# Altium PCB ESE516_BareBoardTemplate.PcbDoc (part 2 of 2)
Units mil, origin at the board's own origin, x right, y up, seen from the top; angles counter-clockwise.
Board outline 2362.21 x 2362.21 mil, 4 copper layers (Top Layer, GroundPlane, PowerPlane, Bottom Layer), stack 58.4 mil thick; 99 components, 72 nets, 333 pads, 111 vias.
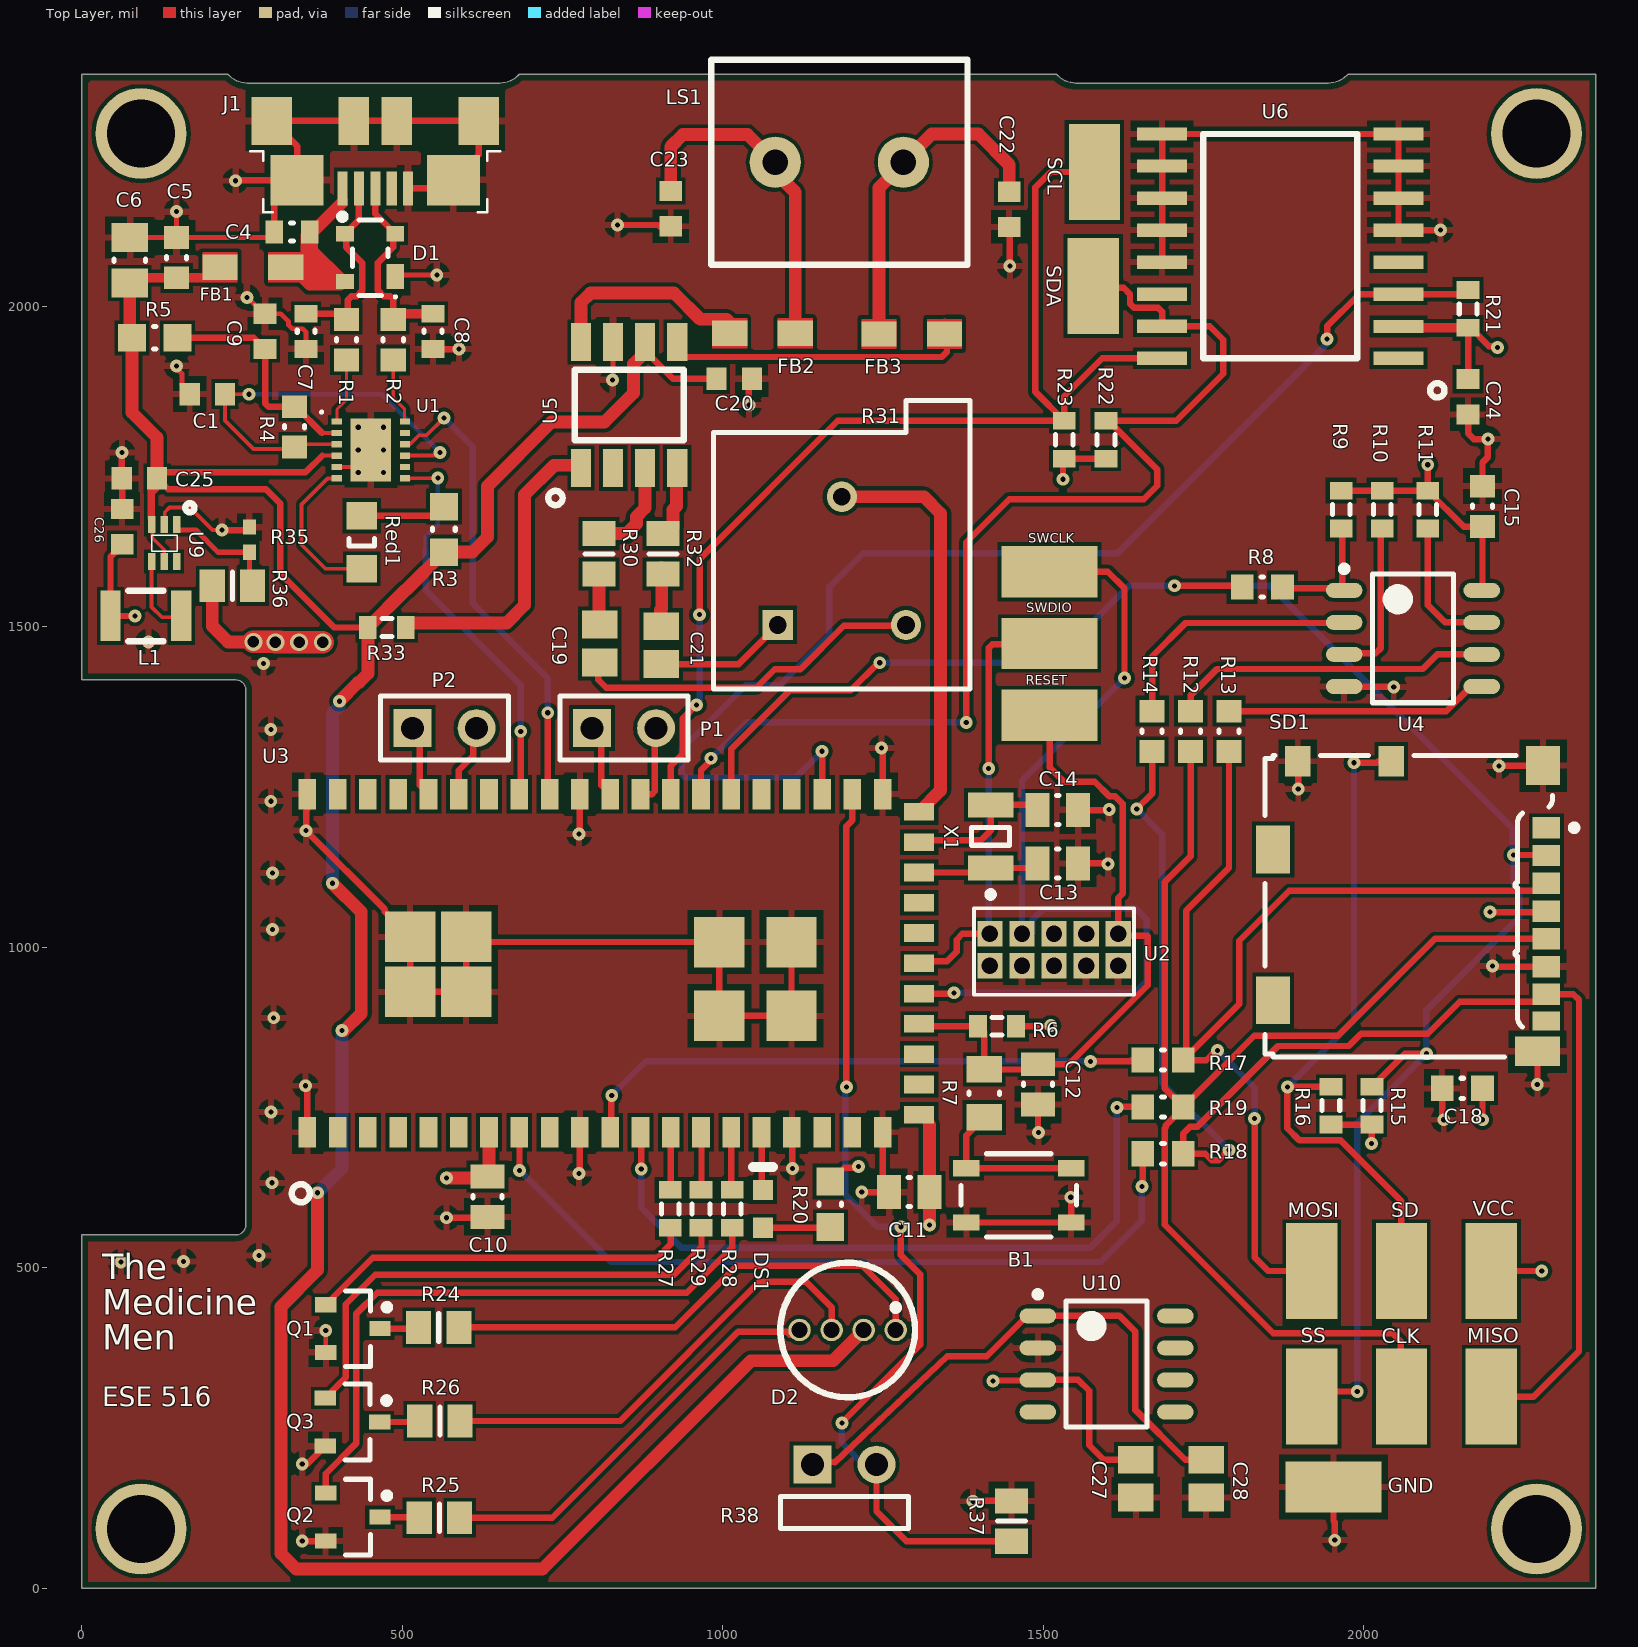
[diagram p0: Top Layer view]

## Via types
v1: diameter 20, hole 8, Top Layer to Bottom Layer, tented both sides, 81 vias
v2: diameter 20, hole 8, Top Layer to Bottom Layer, 26 vias
v3: diameter 28, hole 18, Top Layer to Bottom Layer, tented both sides, 4 vias

## Nets (pads, with @x,y where several pads share a name; then routed paths per layer and width w, separated by ;. In a path a pad name is that pad's centre, name@x,y a point inside that pad or via, vN(x,y) a via of type N, cw(c..) or ccw(c..) an arc to the next point about the centre after c; other vN are vias at no path point) (continued)
NetC9_2: C9.2 R4.2 R5.2 U1.2 | length 359.4
  Top Layer w6: 374.89,1802.57 U1.2
  Top Layer w10: R5.2 268.44,1951 C9.2 286,1849 291.5,1843.5 R4.2 333.97,1843.5 374.89,1802.57
NetC19_1: C19.1 R31.3 | length 556.6
  Top Layer w10: C19.1@810,1442.47 C19.1 806,1442.47 806,1417.22 818.22,1405 1052.25,1405 1081.07,1433.82 1121.32,1433.82 1189,1501.5 1284.5,1501.5 R31.3
NetC19_2: C19.2 R30.1 | length 66
  Top Layer w20: C19.2@807,1521.12 R30.1@807,1587.09
NetC21_1: C21.1 R31.1 | length 215.1
  Top Layer w10: C21.1 1024.95,1441.95 R31.1
  Top Layer w20: C21.1 C21.1@909.53,1447.47
NetC21_2: C21.2 R32.1 | length 68.2
  Top Layer w20: C21.2@903,1522.53 904,1523.53 ; 903,1526.53 905,1528.53 905,1582.5 R32.1@905,1592.5
NetC22_1: C22.1 FB3.2 LS1.1 | length 528.8
  Top Layer w20: FB3.2 1243.82,2185.22 1282,2223.4 LS1.1 1326.18,2269 1399,2269 1447,2221 C22.1
NetC23_2: C23.2 FB2.2 LS1.2 | length 537.3
  Top Layer w20: C23.2 919,2249 938,2268 1038.82,2268 LS1.2 1082,2209.4 1113.18,2178.22 FB2.2
NetDS1_1: DS1.1 R20.2 | length 102.5
  Top Layer w10: DS1.1@1066,562.47 1166.91,562.47 R20.2
NetL1_1: L1.1 U9.4 | length 124.3
  Top Layer w6: U9.4 109,1588.3 109,1531 125,1515 153.12,1515 L1.1
NetQ1_1: Q1.1 R24.1 | length 61
  Top Layer w10: Q1.1 523.5,405 R24.1
NetQ1_2: Q1.3 R27.2 | length 603
  Top Layer w10: Q1.3 454.12,515.84 897.84,515.84 919,537 R27.2@919,562.47
NetQ2_1: Q2.1 R25.1 | length 61.6
  Top Layer w10: Q2.1 525.5,111 R25.1
NetQ2_2: Q2.3 R28.2 | length 959.8
  Top Layer w10: Q2.3 380.68,178.58 428,225.9 428,428 461,461 944,461 1015,532 R28.2
NetQ3_1: Q3.1 R26.1 | length 63.2
  Top Layer w10: Q3.1 525.6,259.4 R26.1
NetQ3_2: Q3.3 R29.2 | length 781.8
  Top Layer w10: Q3.3 412,328.8 412,443 458,489 924,489 967,532 R29.2@967,562.47
NetR3_1: R3.1 Red1.2 | length 133.8
  Top Layer w10: Red1.2 550.91,1673.34 R3.1
NetR30_2: R30.2 U5.3 | length 157.2
  Top Layer w20: R30.2 850.02,1645.5 865.41,1660.88 865.41,1671.81 879,1685.4 U5.3
NetR32_2: R32.2 U5.4 | length 114.7
  Top Layer w20: R32.2 912.91,1645.5 922.59,1655.18 922.59,1682.59 928.05,1688.05 928.05,1746.72 U5.4
NetR33_1: R33.1 U5.1 | length 487.2
  Top Layer w20: R33.1 512.53,1506 663,1506 691,1534 691,1706 737.07,1752.07 779,1752.07 U5.1@773.21,1757.86
NetR35_2: R35.2 R36.1 U9.1 | length 189.9
  Top Layer w8: U9.1 148.37,1652.81 150.28,1650.91 178.09,1650.91 212.69,1616.31 R35.2 261.72,1568.78 R36.1
NetRed1_1: Red1.1 U1.6 | length 244.2
  Top Layer w6: U1.6 383.71,1731.71 343,1691 343,1628 380.34,1590.66 Red1.1
PA10: P1.2 U3.40 | length 123.6
  Top Layer w10: U3.40 889.71,1239 894.15,1243.44 894.15,1340.15 P1.2
PA11: P1.1 U3.41 | length 114.8
  Top Layer w10: P1.1 810.66,1327.34 810.66,1252.78 U3.41
RED: D2.1 R24.2 | length 785.8
  Top Layer w10: R24.2 926,407 1022,503 1218,503 1270,451 D2.1@1270,408
RED_PIN: R27.1 U3.13 | length 89.9
  Top Layer w10: U3.13 919,711.37 R27.1@919,621.53
RTC_INT: R21.1 U3.34 U6.3 | length 1927.6
  Top Layer w10: U3.34 v1(1155.15,1306) ; v1(1943,1949) 1943,1969 1993,2019 U6.3 2156.47,2019 R21.1
  Bottom Layer w10: v1(1155.15,1306) 1114.15,1265 941.86,1265 936,1270.86 936,1309 1036,1409 1089,1409 1166,1486 1166,1561.65 1219.35,1615 1616,1615 1943,1942 v1(1943,1949)
SCL: R23.1 SCL.1 U3.39 U6.16 | length 1744.3
  Top Layer w10: U3.39 918.93,1282.96 938.01,1302.04 938.01,1357.01 v1(959,1378) ; v1(964,1519) 964,1606 1179.53,1821.53 R23.1 ; SCL.1 1511.72,2209.72 1488,2186 1488,1866.53 R23.1 ; U6.16 1592,1919 1533,1860 R23.1
  Bottom Layer w10: v1(959,1378) 959,1380.71 964,1385.71 v1(964,1519)
SD_CARD_DETECT: R16.1 SD1.9 SD.1 | length 1074.6
  Top Layer w10: R16.1 1881.53,782.53 v1(1881,782) 1881,717.78 1900.09,698.69 1964.31,698.69 2059,604 SD.1 ; v1(1985,1288) 2021,1288 2023.28,1290.28 SD1.9
  Bottom Layer w10: v1(1881,782) 1985,886 v1(1985,1288)
SDA: R22.1 SDA.1 U3.38 U6.15 | length 1785.2
  Top Layer w10: U3.38 966.17,1276.47 982,1292.29 v1(982,1295) ; v1(1380,1351) 1380,1632 1447,1699 1657,1699 1678,1720 1678,1745.46 R22.1@1601.94,1821.53 ; SDA.1@1550,2029 1625.55,2029 1635.57,2018.98 1635.57,2004.01 1642.02,1997.57 1679.43,1997.57 1685.55,1991.45 U6.15 1760.14,1969 1781,1948.14 1781,1895 1707.53,1821.53 R22.1@1601.94,1821.53 ; R22.1 R22.1@1601.94,1821.53
  Bottom Layer w10: v1(982,1295) 1038,1351 v1(1380,1351)
SERCOM1_PAD2_SPI_MISO: R18.1 U3.8 | length 1221.9
  Top Layer w10: U3.8 683,711.15 v1(683,652) ; v1(1654,627) 1655.5,628.5 R18.1
  Bottom Layer w10: v1(683,652) 826,509 1590,509 1654,573 v1(1654,627)
SERCOM1_PAD2_SPI_MOSI: R17.1 U3.11 | length 909.9
  Top Layer w10: U3.11 826,713 826,768 v1(827,769) ; v1(1574,822) 1635.79,822 1637.79,824 R17.1
  Bottom Layer w10: v1(827,769) 880,822 v1(1574,822)
SERCOM1_PAD3_SPI_SCK: R19.1 U3.12 | length 1121.4
  Top Layer w10: U3.12 873,710.13 v1(873,654) ; v1(1615,750) 1616,751 R19.1
  Bottom Layer w10: v1(873,654) 873,594 936,531 1573,531 1615,573 v1(1615,750)
Speaker+: FB3.1 U5.5 | length 489.8
  Top Layer w10: U5.5 929,1932.07 940.07,1921 1342,1921 1350,1929 1350,1972.18 FB3.1@1346.18,1976
Speaker-: FB2.1 U5.8 | length 317.3
  Top Layer w20: U5.8 779,2006 794,2021 924,2021 965,1980 1005.82,1980 FB2.1@1009.82,1976
SWCLK: SWCLK.1 U2.4 U3.25 | length 1406.7
  Top Layer w10: U3.25 1359.61,927.82 v2(1360.79,929) ; SWCLK.1 1600.96,1586 1626.93,1560.03 v2(1626.93,1420)
  Bottom Layer w10: v2(1360.79,929) 1642.93,929 1661.93,948 1661.93,1043.07 1645,1060 1500.46,1060 1483,1042.54 U2.4@1483,1021 ; U2.4 1467,1260.07 v2(1626.93,1420)
SWDIO: SWDIO.1 U2.2 U3.26 | length 685.4
  Top Layer w10: U3.26 1309.31,978 1349.64,978 1365,993.36 1365,1012 1374,1021 U2.2 ; v2(1415,1279) 1415,1467.14 1420.86,1473 1509,1473 SWDIO.1
  Bottom Layer w10: v2(1415,1279) 1415,1023 U2.2
UART_RX_CLI: U1.7 U3.44 | length 622.4
  Top Layer w6: 512.02,1731.71 U1.7 504.3,1731.85 555.44,1731.85 v1(555.59,1732)
  Top Layer w10: U3.44 685,1241.29 v1(685,1337)
  Bottom Layer w7.38: 537,1620 537,1640 555.59,1658.59 v1(555.59,1732)
  Bottom Layer w10: 537,1620 537,1557 685,1409 v1(685,1337)
UART_TX_CLI: U1.10 U3.43 | length 733.2
  Top Layer w6: U1.10 512.02,1784.86 526.08,1798.92 537.92,1798.92 v1(565,1826)
  Top Layer w10: v1(727,1366) 727,1241.95 U3.43
  Bottom Layer w10: v1(565,1826) 610,1781 610,1537 727,1420 v1(727,1366)
USB_DATA_N: C7.2 D1.3 J1.2 R1.1 | length 308.1
  Top Layer w10: C7.2 403.94,1988.56 R1.1 414.97,1979.5 414.97,2009.97 420.79,2015.79 428.97,2015.79 437.91,2024.73 437.91,2067.09 413,2092 413,2111.03 D1.3 432.46,2135.23 J1.2
USB_DATA_P: C8.2 D1.2 J1.3 R2.1 | length 310.6
  Top Layer w10: J1.3 458.05,2144.72 D1.2 486,2110.03 486,2092.12 462.09,2068.21 462.09,2024.73 471.03,2015.79 481.21,2015.79 486,2011 R2.1
  Top Layer w15: R2.1 495.06,1988.56 C8.2
USB_FTDI_DATA_N: R1.2 U1.1 | length 99.8
  Top Layer w5: U1.1@398.22,1822.87 398.22,1839.22 399,1840 413,1854 R1.2
USB_FTDI_DATA_P: R2.2 U1.12 | length 101
  Top Layer w5: R2.2 486,1857.15 503.15,1840 503.78,1839.37 U1.12@503.78,1822.87
V_BAT: U6.14
VBUS: C4.2 D1.4 FB1.1 J1.1 | length 207.4
  Top Layer w15: FB1.1 326.06,2060.93 354.98,2032 404.03,2032 D1.4 355.56,2093.67 C4.2
VCC_MCU: C10.2 C11.2 C15.2 C18.2 C24.1 C26.2 C27.2 L1.2 R6.2 R9.2 R10.2 R11.2 R15.2 R16.2 R20.1 R21.2 R22.2 R23.2 R36.2 SD1.4 U2.1 U3.7 U3.21 U4.8 U6.2 U10.3 VCC.1 | length 2243.2
  Top Layer w10: C26.2@68,1632.44 44.88,1609.32 L1.2 v2(82.94,1517) ; v3(267.87,1476.57) 268.16,1476.29 301.71,1476.29 v3(302,1476) ; C10.2 C10.2@635.46,644.96 ; R20.1 1189.65,656.09 1210.09,656.09 v1(1212,658) ; U3.21 1322.5,722.72 ; v2(1422,323.31) 1422.84,324.16 1490.87,324.16 U10.3 1555,325 1572,308 1572,223 1594.47,200.53 C27.2 ; R6.2 1511,877 v1(1512,878) ; v1(1531,1730.28) 1531,1760.47 R23.2 R22.2 ; R16.2 R15.2 2012.53,723 v1(2012.53,694) ; R9.2 R10.2 R11.2 ; U6.2 U6.2@2056.58,1966.47 ; v1(2100,1753) R11.2 ; C24.1 R21.2 2166.94,1966.47 2195.5,1937.91 2207.09,1937.91 v1(2209,1936) ; U4.8 2185.5,1558.21 C15.2@2185.5,1651 ; v1(2185.5,731) C18.2 ; C15.2 2156.02,1656.5 R11.2 ; v2(2197,1055) 2283.47,1055 SD1.4 ; VCC.1 v1(2278,495)
  Top Layer w15: U6.2@2056.58,1966.47 R21.2
  Top Layer w20: C26.2@55.28,1623.13 61.03,1628.88 C26.2 ; R36.2 203.5,1501.5 228.43,1476.57 v3(267.87,1476.57) ; v1(569,640) 630.5,640 C10.2 ; C10.2@635.46,644.96 U3.7 ; v1(1322.5,567) C11.2 1322.5,722.72
  Top Layer w35: v3(267.87,1476.57) v3@310,1476.57 ; v3(302,1476) v3(339.06,1476) v3(376,1476)
  GroundPlane w10: v1(2012.53,694) v1@2013,694
VCCIO: C1.2 R4.1 U1.3 U1.9 | length 666.9
  Top Layer w6: v1(261,1863) C1.2 223.56,1821.87 268,1777.43 328.93,1777.43 R4.1 336.35,1784.86 U1.3 ; U1.9 550.73,1767.14 555.59,1772 v1(559,1772)
  Bottom Layer w7.38: v1(261,1863) 468,1863 v1(559,1772)
VUSB: C5.2 C6.2 C20.1 C25.2 D2.2 FB1.2 R3.2 R5.1 R33.2 U1.4 U5.6 U9.3 U9.5 | length 4840
  Top Layer w6: C25.2@109,1723.15 U9.3 109.91,1659.09 109.91,1639.09 128.68,1620.31 U9.5 ; 375.14,1767.14 U1.4
  Top Layer w7.38: R5.1@75,1954.57 R5.1 ; C6.2 C6.2@82.94,2044.5 ; R5.1@95.57,1953 R5.1@96,1953 ; C5.2 167.68,2044.5 168.12,2044.94 ; FB1.2@199.82,2044.94 FB1.2
  Top Layer w10: C25.2@109,1723.15 117.41,1731.56 C25.2 ; 375.14,1767.14 349,1741 126.85,1741 C25.2 ; R33.2 394,1499 310,1583 310,1692 287.53,1714.47 134.8,1714.47 C25.2 ; U5.6 879,1930.51 922.51,1887 C20.1
  Top Layer w15: C6.2@82.94,2044.5 C5.2 ; 168.12,2044.94 FB1.2@199.82,2044.94
  Top Layer w20: R5.1@75,1954.57 C6.2 ; R5.1 78.57,1834.43 117.41,1795.59 C25.2@117.41,1731.56 ; v2(368,617) 368,496.4 310.72,439.12 310.72,54 334.72,30 719,30 1044,355 1172,355 D2.2 ; v2(391,1100) 436,1055 436,896.72 409.28,870 v2(406.07,870) ; v2(402,1384) 431,1413 432.46,1413 446.47,1427.02 R33.2 505.47,1558 506.43,1558 R3.2 609.57,1616.57 633,1640 633,1719.44 733,1819.44 815.44,1819.44 860.79,1864.79 860.79,1910.09 U5.6@878,1927.31
  Bottom Layer w20: v2(368,617) 406.07,655.07 v2(406.07,870) ; v2(391,1100) 391,1365.1 402,1376.1 v2(402,1384)
XIN_32: C13.1 U3.29 X1.1 | length 191
  Top Layer w10: U3.29 1411.01,1116.8 X1.1 1484.29,1123.79 C13.1
XOUT_32: C14.1 U3.30 X1.2 | length 236.2
  Top Layer w10: U3.30 1309.33,1167 1403,1167 1418,1182 X1.2 1483.29,1222.21 C14.1
pads on no net: J1.4 SD1.1 SD1.8 SD1.13 SD1.14 U1.8 U1.11 U2.5 U2.6 U2.8 U3.2 U3.3 U3.4 U3.5 U3.6 U3.9 U3.18 U3.19 U3.22 U3.23 U3.27 U3.28 U3.35 U3.36 U3.45 U3.48 U3.49 U3.50 U5.2 U6.1 U6.4 U9.6 U10.4 U10.5 U10.6 U10.7 U10.8

## Polygon pours and split planes (outlines as drawn)
GND on GroundPlane "GroundPlane-GND" (solid, pour order 0): 37.52,2318.5 37.52,37.52 2318.5,37.52 2318.5,2318.5
VCC_MCU on PowerPlane "PowerPlane-VCC_MCU" (solid, pour order 2): 34.88,2305.09 34.88,46.1 22.1,46.1 2305.09,46.1 2299.44,2310.45
GND on Bottom Layer "Bottom Layer-GND" (solid, pour order 6): -233,2529 -233,-41 -146,-128 2553,-128 2553,2503 2490,2566 2457,2533 -237,2533
GND on Top Layer "Top Layer-GND" (solid, pour order 4): 2496,-122 2496,2551 2492,2555 2474,2537 -213,2537 -213,-154 -190,-131 2492,-131 2736,113 2651,33

## Other copper
Top Layer:
  region net VBUS: 342,2113 343.97,2111.03 368,2111.03 368,2091 409,2050 404.03,2045.03 404.03,2032 354.98,2032 342,2044.98
  region: 1040.56,1975
  region: 1044,2016
  region net VBUS: 342,2133 364.24,2133 399.24,2168 414.97,2168 414.97,2158 368,2111.03 368,2105
  region: 133,1692
  region net VUSB: 103,1668 103,1726 131,1726 132,1725 114,1707 114,1671
  region: 94,1690
  region: 123,1402
  region: 307,1512
  region: 990.16,1868.07

## Silkscreen, mask and mechanical layers (free items; w line width, h text height)
Top Overlay:
  lines w2: 109,1618 149,1618 149,1643 109,1643 109,1618
  text "The" at 32,482 h40
  text "Medicine" at 32,427 h40
  text "Men" at 32,372 h40
  text "ESE 516" at 32,284 h30
Bottom Overlay:
  text "Hanna" at 582,2241 h50
  text "Garberman" at 1966,2238 h50
  text "2019" at 196,452 h40
  text "University of Pennsylvania" at 1689,62 h40
Top Solder:
  rectangle: 874,1556 937,1608
  rectangle: 469,887 643,1060
  rectangle: 395,2154 521,2215
  region: 970,1990 1051,1990 1051,1926 970,1926
  region: 1070.5,1990 1151.5,1990 1151.5,1926 1070.5,1926
  region: 1203,1990 1284,1990 1284,1926 1203,1926
  region: 1305,1990 1386,1990 1386,1926 1305,1926
  region: 556.5,2071 657.5,2071 657.5,2000 556.5,2000
  region: 170,2092 254.5,2092 254.5,2023 170,2023
Mechanical 1:
  the board outline again, w10
Mechanical 9:
  the board outline again, w2